# Altium PCB Beacon_V3.PcbDoc
Units mm, origin at the board's own origin, x right, y up, seen from the top; angles counter-clockwise.
Board outline 92.94 x 82.63 mm, 2 copper layers (Top Layer, Bottom Layer); 64 components, 45 nets, 274 pads, 197 vias.
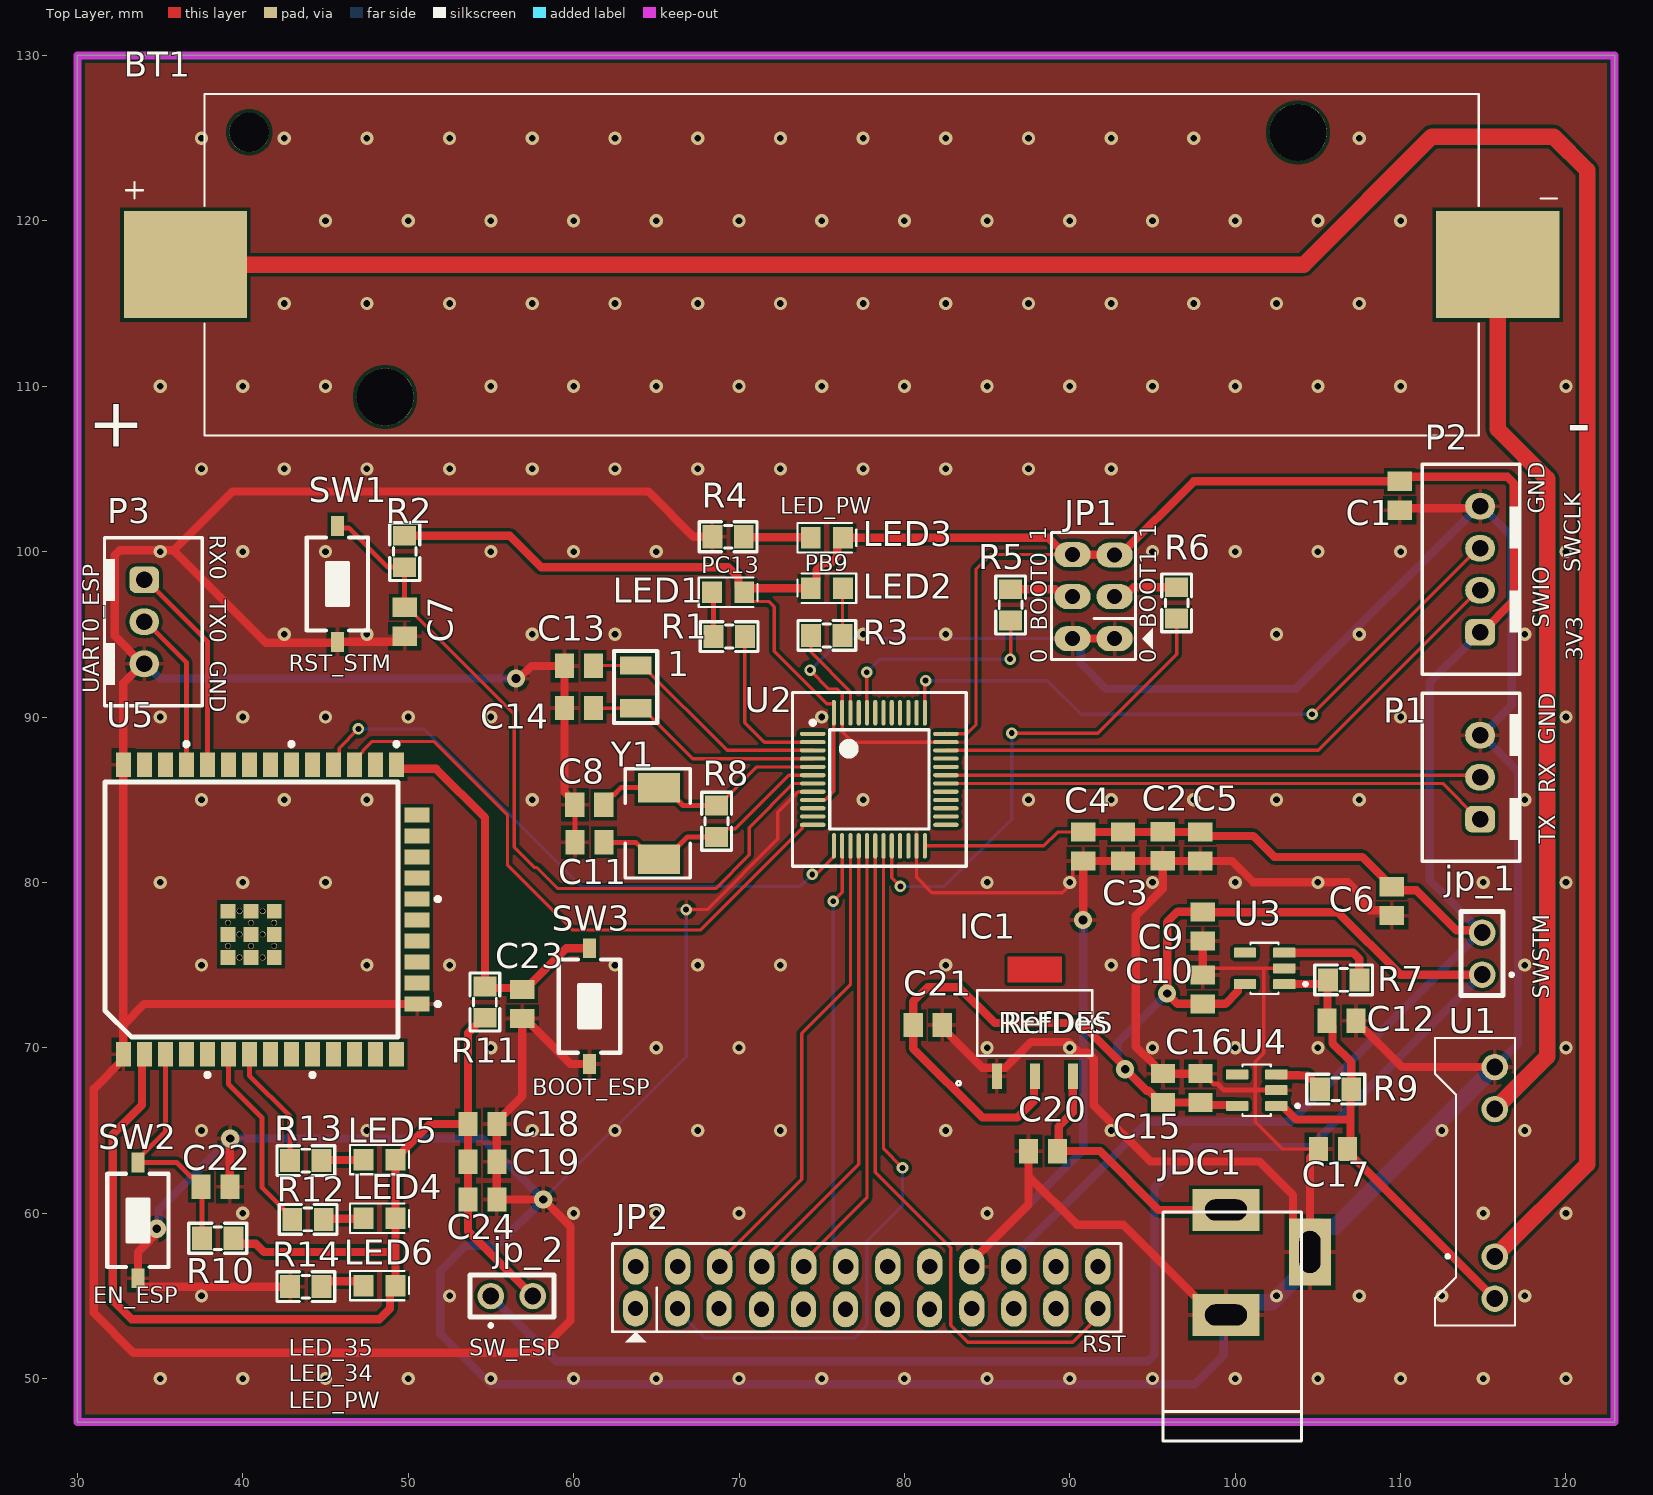
[diagram p0: Top Layer view]
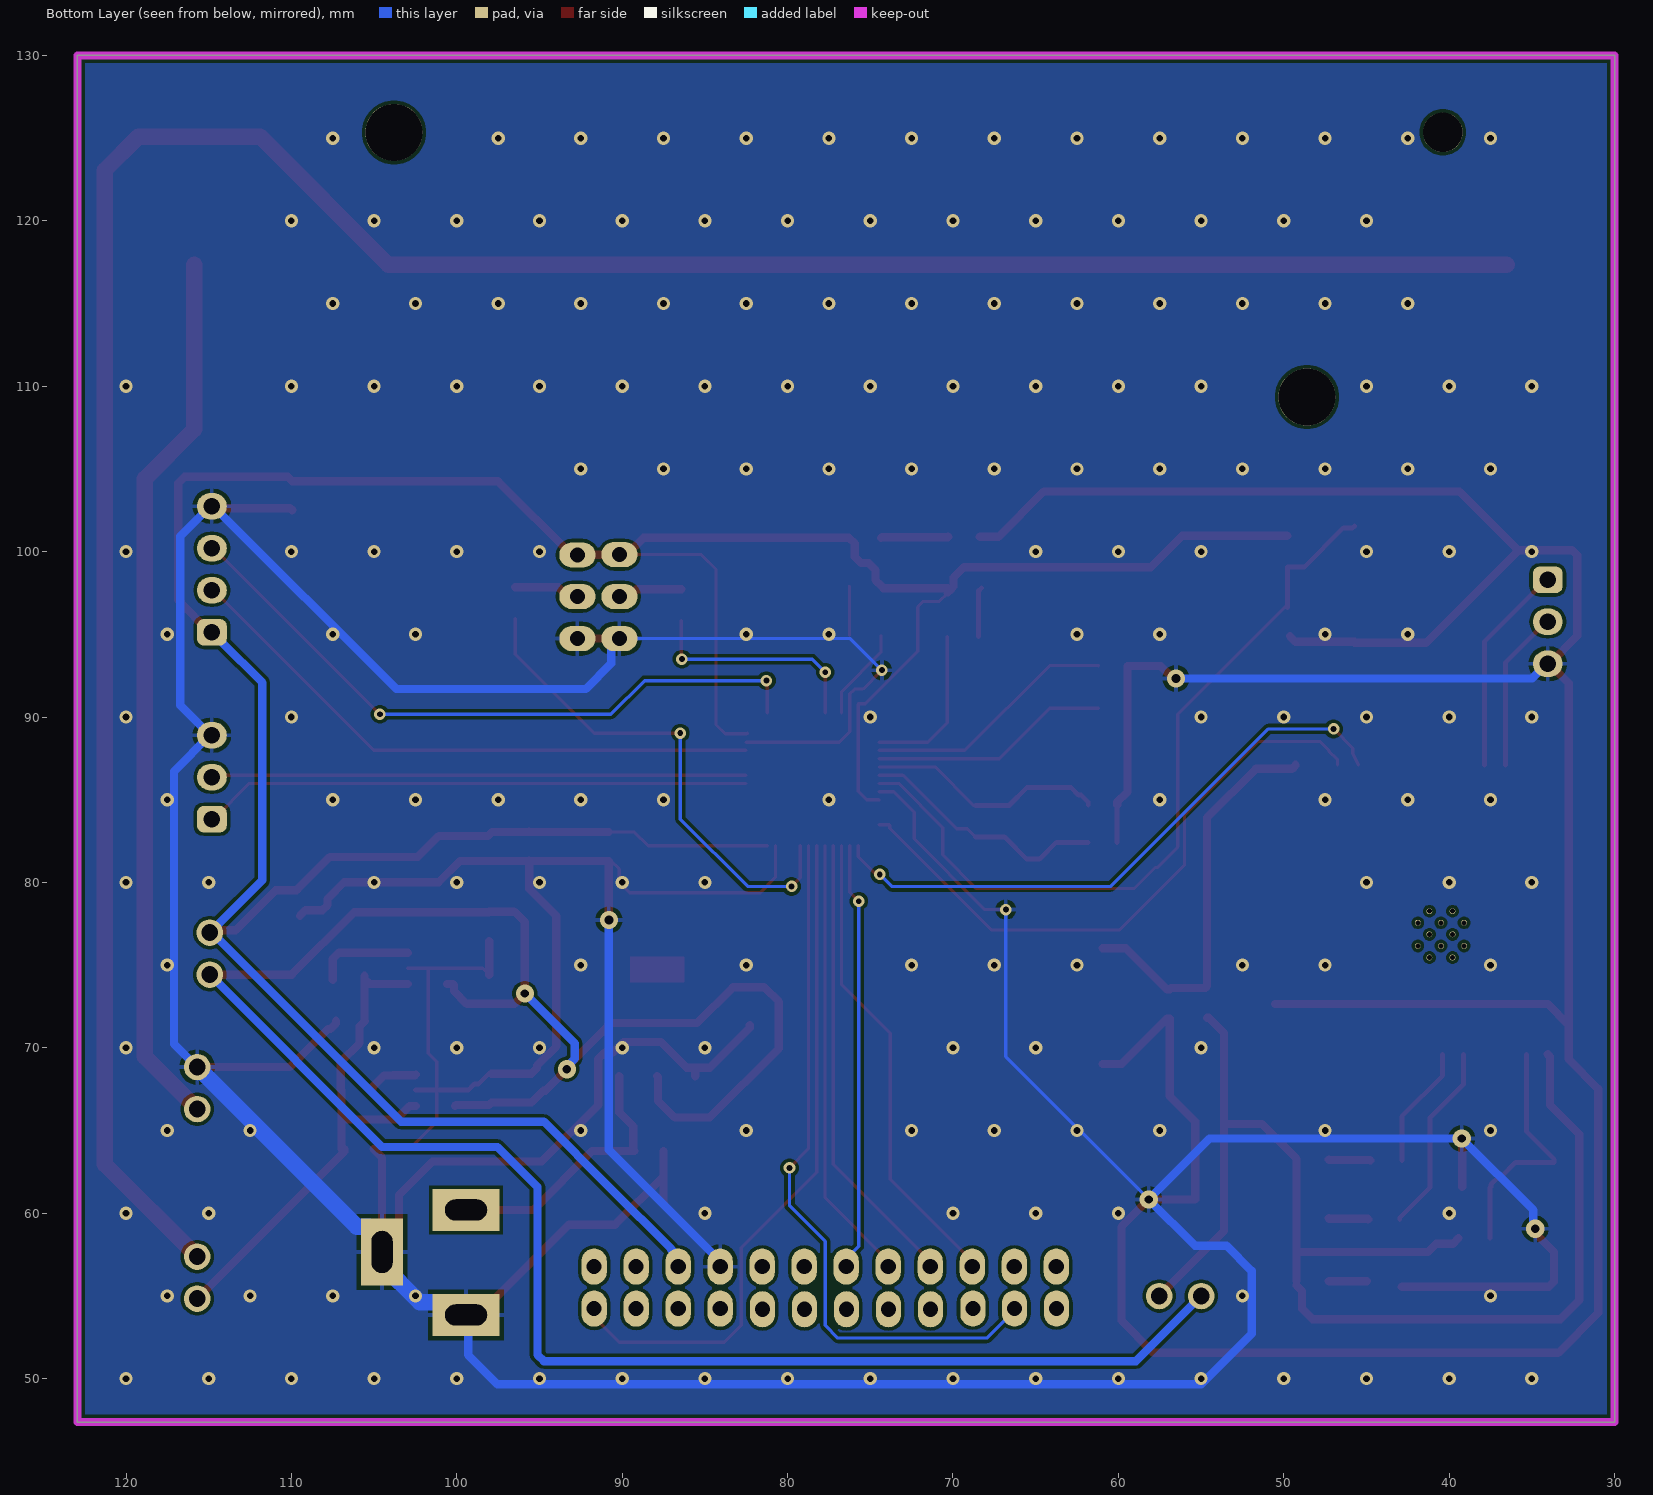
[diagram p1: Bottom Layer view, seen from below]

## Layer stack, top to bottom
Top Solder: solder mask 0.0102, Solder Resist, Dk 3.5
Top Layer: signal copper 0.0356
Dielectric 1: dielectric 0.32, FR-4, Dk 4.8
Bottom Layer: signal copper 0.0356
Bottom Solder: solder mask 0.0102, Solder Resist, Dk 3.5

## Board outline
30,47.371 30,130 122.936,130 122.936,47.371

## Design rules (kind name [scope] priority, off if disabled: settings)
Clearance [All] p1: gap=0.2 ignorepadtopadclearanceinfootprint=FALSE
PolygonConnect [All] p1: connectstyle=Relief reliefconductorwidth=0.254 reliefentries=4 polygonreliefangle="90 Angle" airgapwidth=0.254
RoutingVias [All] p1: holewidth=0.711 width=1.27 viastyle="Through Hole" minholewidth=0.711 minwidth=1.27 maxholewidth=0.711 maxwidth=1.27
SolderMaskExpansion [All] p1: expansion=0.102 istentingtop=FALSE
Width POW [InNetClass('POW')] p1: maxlimit=1 minlimit=0.2 preferedwidth=0.5
Width RON [InNetClass('RON')] p2: maxlimit=0.5 minlimit=0.2 preferedwidth=0.3
30 further rules are at their usual default settings.

## Classes and differential pairs
net class RON: BOOT0 BOOT1 BOOT_ESP DB_RX DB_TX DC_IN DW_IRQ DW_NSS DW_RESET EN_ESP LED_ESP_34 LED_ESP_35 MISO MOSI NetJP1_2 NetJP1_5 NetLED1_2 NetLED2_2 NetLED3_2 NetLED4_2 NetLED5_2 NetLED6_2 NetR7_2 NetR9_2 OSCIN OSCOUT PB9 PC13 PC14 PC15 RESET RX0_ESP SCK STMRX_ESPTX STMTX-ESPRX SWCLK SWIO TX0_ESP
net class POW: 3V3 3V3_ESP GND O_3V3 VBAT+ VBAT- VOUT

## Components (designator, comment, footprint, x,y, rotation, side; value= is the part's Value field where it differs from the comment)
1 "ABS07" ABS07 63.754,91.821 r90 top
BT1 "1042P" BAT_1042P 76.2,117.348 r180 top
C1 "10uF" Capacitor_0805 109.944,103.378 r90 top
C2 "0.1uF" Capacitor_0805 95.615,82.183 r270 top
C3 "0.1uF" Capacitor_0805 93.218,82.169 r270 top
C4 "0.1uF" Capacitor_0805 90.805,82.169 r270 top
C5 "0.1uF" Capacitor_0805 97.886,82.169 r270 top
C6 "0.1uF" Capacitor_0805 109.474,78.867 r270 top
C7 "0.1uF" Capacitor_0805 49.784,95.758 r270 top
C8 "20pF" Capacitor_0805 60.946,84.693 r0 top
C9 "47uF" Capacitor_0805 98.044,77.329 r270 top
C10 "0.1uF" Capacitor_0805 98.044,73.533 r90 top
C11 "20pF" Capacitor_0805 60.96,82.423 r0 top
C12 "0.1uF" Capacitor_0805 106.426,71.628 r0 top
C13 "20pF" Capacitor_0805 60.325,93.091 r0 top
C14 "20pF" Capacitor_0805 60.325,90.551 r0 top
C15 "47uF" Capacitor_0805 95.633,67.564 r90 top
C16 "0.1uF" Capacitor_0805 97.904,67.564 r90 top
C17 "0.1uF" Capacitor_0805 105.918,63.881 r180 top
C18 "0.1uF" Capacitor_0805 54.483,65.389 r0 top
C19 "10uF" Capacitor_0805 54.483,63.119 r0 top
C20 "10uF" Capacitor_0805 88.378,63.754 r180 top
C21 "10uF" Capacitor_0805 81.407,71.374 r0 top
C22 "10uF" Capacitor_0805 38.34,61.595 r0 top
C23 "10uF" Capacitor_0805 56.896,72.644 r270 top
C24 "0.1uF" Capacitor_0805 54.483,60.833 r0 top
IC1 "NCP1117ST33T3G" SOT223-3_ONS 87.884,71.501 r0 top
JDC1 "Jac DC" DC-IN 101.981,57.023 r90 top
JP1 "Connector 3x2" JP3x2 91.44,97.282 r90 top
JP2 "Connector 12x2" JP12X2_1 63.754,54.229 r0 top
jp_1 "SW_POWER" JP_1x2 114.935,75.692 r90 top
jp_2 "SW_ESP" JP_1x2 56.261,54.991 r0 top
LED1 "Led" "Led 0805 Blue" 69.342,97.536 r180 top
LED2 "Led" "Led 0805 Blue" 75.311,97.79 r0 top
LED3 "Led" "Led 0805 Blue" 75.311,100.838 r180 top
LED4 "Led" "Led 0805 Blue" 48.26,59.69 r180 top
LED5 "Led" "Led 0805 Blue" 48.26,63.246 r180 top
LED6 "Led" "Led 0805 Blue" 48.26,55.626 r180 top
P1 "UART" HDR/Header/3/BOX 114.808,86.36 r180 top
P2 "SWD" HDR/Header/4/BOX 114.808,98.933 r90 top
P3 "UART" HDR/Header/3/BOX 34.036,95.758 r0 top
R1 "1k" "tro smd 0805" 69.399,94.93 r0 top
R2 "10k" "tro smd 0805" 49.723,100.006 r90 top
R3 "1k" "tro smd 0805" 75.311,94.869 r180 top
R4 "1k" "tro smd 0805" 69.342,100.838 r180 top
R5 "10k" "tro smd 0805" 86.36,96.774 r90 top
R6 "10k" "tro smd 0805" 96.52,96.901 r270 top
R7 "1k" "tro smd 0805" 106.553,74.168 r0 top
R8 "1M" "tro smd 0805" 68.58,83.693 r90 top
R9 "1k" "tro smd 0805" 106.074,67.437 r180 top
R10 "10k" "tro smd 0805" 38.481,58.547 r0 top
R11 "10k" "tro smd 0805" 54.696,72.771 r270 top
R12 "1k" "tro smd 0805" 43.942,59.563 r180 top
R13 "1k" "tro smd 0805" 43.815,63.119 r180 top
R14 "1k" "tro smd 0805" 43.815,55.499 r180 top
SW1 "SW" SW1-SMD 45.72,98.044 r90 top value="SW chip 2 pin"
SW2 "SW" SW1-SMD 33.655,59.563 r90 top value="SW chip 2 pin"
SW3 "SW" SW1-SMD 60.96,72.517 r90 top value="SW chip 2 pin"
U1 "TP4056_charger" TP4056_charger 127.197,61.834 r180 top
U2 "STM32F103C8T6" LQFP48 78.486,86.233 r270 top
U3 "AP2112K-3.3TRG1" SOT95P285X140-5N 101.78,74.803 r180 top
U4 "AP2112K-3.3TRG1" SOT95P285X140-5N 101.301,67.437 r180 top
U5 "ESP32_WROOM_32U" ESP32_WROOM_32U 41.656,78.359 r90 top
Y1 "8Mhz" "Thach Anh 2 chan SMD5032" 65.151,83.566 r90 top value=4Mhz

## Footprints (in the part's own frame and the unit in brackets; to place one, negate y for a bottom-side part, rotate by r counter-clockwise, add the part's x,y. Pads: shape width x height; smd on the part's side, far side on the other; paste and mask are expansions set on the pad)
ABS07 [mm] "HC-49US XTAL"
  rect 1.1x1.9 smd: 1(-1.29,0) 2(1.29,0)
  silkscreen extent -2.19,-1.3 2.18,1.31, body extent -1.6,-0.75 1.6,0.75, height 0.9
BAT_1042P [mm]
  rect 7.46x6.47 smd: N(-39.67,0) P(39.67,0)
  round 3.45 hole 3.45 unplated: ""(-27.6,-8) ""(27.6,8)
  round 2.39 hole 2.39 unplated: ""(35.82,-8)
  silkscreen extent -43.25,-10.32 43.25,10.32, body extent -43,-9.94 43,10.71, height 14.86
Capacitor_0805 [mm]
  rect 1.16x1.47 smd: 1(-0.875,0) 2(0.875,0)
  body extent -1,-0.6 1,0.6, height 1.2
DC-IN [mil] "Jac DC input"
  rect 100x160 hole 50 slot 100 at 90 deg: 1(125,100) 2(-125,100)
  rect 160x100 hole 50 slot 100 at 0 deg: 3(25,-100)
  silkscreen extent -425,-80 120,250, body extent -410,-105 134,269, height 434
ESP32_WROOM_32U [mm]
  rect 1.5x0.9 smd: 1(-8.75,8.88) 2(-8.75,7.61) 3(-8.75,6.34) 4(-8.75,5.07) 5(-8.75,3.8) 6(-8.75,2.53) 7(-8.75,1.26) 8(-8.75,-0.01) 9(-8.75,-1.28) 10(-8.75,-2.55) 11(-8.75,-3.82) 12(-8.75,-5.09) 13(-8.75,-6.36) 14(-8.75,-7.63) 25(8.75,-7.63) 26(8.75,-6.36) 27(8.75,-5.09) 28(8.75,-3.82) 29(8.75,-2.55) 30(8.75,-1.28) 31(8.75,-0.01) 32(8.75,1.26) 33(8.75,2.53) 34(8.75,3.8) 35(8.75,5.07) 36(8.75,6.34) 37(8.75,7.61) 38(8.75,8.88)
  rect 0.9x1.5 smd: 15(-5.715,-8.88) 16(-4.445,-8.88) 17(-3.175,-8.88) 18(-1.905,-8.88) 19(-0.635,-8.88) 20(0.635,-8.88) 21(1.905,-8.88) 22(3.175,-8.88) 23(4.445,-8.88) 24(5.715,-8.88)
  rect 0.9x0.9 smd: 39_1(-2.9,2.56) 39_2(-1.5,2.56) 39_3(-0.1,2.56) 39_4(-2.9,1.16) 39_5(-1.5,1.16) 39_6(-0.1,1.16) 39_7(-2.9,-0.24) 39_8(-1.5,-0.24) 39_9(-0.1,-0.24)
  round 0.35 hole 0.3 mask+0: 40_1(-2.2,2.56) 40_2(-0.8,2.56) 40_3(-2.9,1.86) 40_4(-1.5,1.86) 40_5(-0.1,1.86) 40_6(-2.2,1.16) 40_7(-0.8,1.16) 40_8(-2.9,0.46) 40_9(-1.5,0.46) 40_10(-0.1,0.46) 40_11(-2.2,-0.24) 40_12(-0.8,-0.24)
  silkscreen extent -10.1,-10.23 10.1,10, body extent -9,-9.13 9,10.07, height 3.35
HDR/Header/3/BOX [mm]
  rrect50% 1.8x1.6 hole 1: 1(0,2.54)
  oval 1.8x1.6 hole 1: 2(0,0) 3(0,-2.54)
  silkscreen extent -2.41,-5.08 3.5,5.08, body extent -2.29,-5 3.41,5, height 7
HDR/Header/4/BOX [mm]
  rrect50% 1.6x1.8 hole 1: 1(-3.81,0)
  oval 1.6x1.8 hole 1: 2(-1.27,0) 3(1.27,0) 4(3.81,0)
  silkscreen extent -6.35,-2.41 6.35,3.5, body extent -6.25,-2.3 6.25,3.4, height 7
JP3x2 [mil] "Connector 3x2"
  oval 60x86 hole 36: 1(-100,-50) 2(0,-50) 3(99,-50) 4(-100,50) 5(0,50) 6(100,50)
  silkscreen extent -150,-141 153,100, body extent -150,-100 150,100, height 335
JP12X2_1 [mil]
  oval 60x86 hole 36: 1(-0.5,0.5) 2(99.5,0.5) 3(198.5,0.5) 4(299.5,-1.5) 5(399.5,-1.5) 6(499.5,-1.5) 7(599.5,-1.5) 8(699.5,-1.5) 9(800,0) 10(900,0) 11(1000,0) 12(1100,0) 13(0,100) 14(100,100) 15(200,100) 16(300,100) 17(400,100) 18(500,100) 19(600,100) 20(700,100) 21(800,100) 22(900,100) 23(1000,100) 24(1100,100)
  silkscreen extent -55,-80 1155,155, body extent -55,-47 1155,150, height 366
JP_1x2 [mm] "CWF2 (DS1069-1x2)"
  round 1.6 hole 1.02 mask+0.1: 1(-1.27,0) 2(1.27,0)
  silkscreen extent -2.54,-1.88 2.54,1.27, body extent -3.77,-2.2 3.73,3.55, height 7
"Led 0805 Blue" [mm]
  rect 1.2x1.3 smd: 1(-0.975,0) 2(0.975,0)
  silkscreen extent -1.78,-0.89 1.78,0.89, body extent -1.01,-0.62 1.01,0.63, height 1.1
LQFP48 [mm]
  oval 0.25x1.55 smd: 1(-2.75,-4.025) 2(-2.25,-4.025) 3(-1.75,-4.025) 4(-1.25,-4.025) 5(-0.75,-4.025) 6(-0.25,-4.025) 7(0.25,-4.025) 8(0.75,-4.025) 9(1.25,-4.025) 10(1.75,-4.025) 11(2.25,-4.025) 12(2.75,-4.025) 25(2.75,4.025) 26(2.25,4.025) 27(1.75,4.025) 28(1.25,4.025) 29(0.75,4.025) 30(0.25,4.025) 31(-0.25,4.025) 32(-0.75,4.025) 33(-1.25,4.025) 34(-1.75,4.025) 35(-2.25,4.025) 36(-2.75,4.025)
  oval 1.55x0.25 smd: 13(4.025,-2.75) 14(4.025,-2.25) 15(4.025,-1.75) 16(4.025,-1.25) 17(4.025,-0.75) 18(4.025,-0.25) 19(4.025,0.25) 20(4.025,0.75) 21(4.025,1.25) 22(4.025,1.75) 23(4.025,2.25) 24(4.025,2.75) 37(-4.025,2.75) 38(-4.025,2.25) 39(-4.025,1.75) 40(-4.025,1.25) 41(-4.025,0.75) 42(-4.025,0.25) 43(-4.025,-0.25) 44(-4.025,-0.75) 45(-4.025,-1.25) 46(-4.025,-1.75) 47(-4.025,-2.25) 48(-4.025,-2.75)
  silkscreen extent -5.25,-5.25 5.25,5.25, body extent -4.5,-4.5 4.5,4.5, height 1.5
SOT95P285X140-5N [mm]
  rrect15% 1.35x0.6 smd: 1(-1.185,0.95) 2(-1.185,0) 3(-1.185,-0.95) 4(1.185,-0.95) 5(1.185,0.95)
  silkscreen extent -2.57,-1.55 0.85,1.55, body extent -1.5,-1.4 1.5,1.4, height 1.4
SOT223-3_ONS [mil]
  rect 24x61 smd paste+0 mask+0: 1(-90.5,-127) 2(0,-127) 3(90.5,-127)
  Top Layer region: 64,96.5 64,157.5 -64,157.5 -64,96.5
  silkscreen extent -186,-148 136,78, body extent -131,-144 131,144, height 68
SW1-SMD [mm]
  rect 1.2x0.8 smd: 1(-3.5,0) 2(3.5,0)
  silkscreen extent -2.82,-1.85 2.82,1.85, body extent -3.05,-1.85 3.05,1.85, height 2.5
"Thach Anh 2 chan SMD5032" [mil]
  rect 70x100 smd: 1(-85,0) 2(85,0)
  silkscreen extent -130,-75 130,80, body extent -98,-63 98,63, height 51
TP4056_charger [mm]
  round 1.6 hole 1.02 mask+0.1: 1(11.5,4.46) 2(11.5,-4.46) 3(11.5,7) 4(11.5,-7)
  silkscreen extent 10.29,-8.76 15.11,8.64, body extent -14.19,-8.76 15.11,8.64, height 9.34
"tro smd 0805" [mm]
  rect 1.2x1.4 smd: 1(-0.946,-0.061) 2(0.954,-0.061)
  silkscreen extent -1.75,-0.97 1.75,0.84, body extent -1.56,-0.76 1.44,0.64, height 0.53

## Part data
1: "SMD Quartz Crystal", Created by="Zion Blue", Published="28 April 2014", Publisher="Cynetik Group"
BT1: "SMT Polarized Battery Holder for 18650 Battery", Package=None, Check_prices=https://www.snapeda.com/parts/1042P/Keystone/view-part/?ref=eda, MF="Keystone Electronics", MP=1042P, SnapEDA_Link=https://www.snapeda.com/parts/1042P/Keystone/view-part/?ref=snap
C1 C2 C3 C4 C5 C6 C7 C8 C9 C10 C11 C12 C13 C14 C15 C16 C17 C18 C19 C20 C21 C22 C23 C24: library part Capacitor_0805, "Capacitor; Ceramic; Cap; .220uF; Tol 10%; SMT; Vol-Rtg 50V; X7R; Tape And Reel"
IC1: "SOT223"
JDC1: library part DCIN, "Jac DC input"
JP1: library part JP3x2
JP2: library part JP12x2
jp_1 jp_2: library part JP_1x2
LED1 LED2 LED3 LED4 LED5 LED6: "Typical LED"
P1 P3: library part "Header 3", "Header, 3-Pin"
P2: library part "Header 4_1", "Header, 4-Pin"
R1 R3 R4 R7 R9 R12 R13 R14: library part "Tro 0805 1% 1k", "Dán", Chung_Loai=Dán, Don_Vi=Con, Ma_Hang=MH005468, So_Chan=2, Ten_Linh_Kien="Trở 0805 1% 1k"
R2 R5 R6 R10 R11: library part "Tro 0805 1% 10k", "Dán", Chung_Loai=Dán, Don_Vi=Con, Ma_Hang=MH005473, So_Chan=2, Ten_Linh_Kien="Trở 0805 1% 10k"
R8: library part "Tro 0805 1% 1M", "Dán", Chung_Loai=Dán, Don_Vi=Con, Ma_Hang=MH005469, So_Chan=2, Ten_Linh_Kien="Trở 0805 1% 1M"
SW1 SW2 SW3: library part SW2, "Switch button 2 pin"
U2: "STM32 ARM-based 32-bit MCU with ARM 32-bit Cortex-M3 Microcontroller, 128 Kbytes Flash, 48-pin LQFP, Industrial Temperature", ComponentLink1Description="Manufacturer Link", ComponentLink1URL=www.st.com/stm32, ComponentLink2Description=Datasheet, ComponentLink2URL=http://www.st.com/stonline/products/literature/ds/13586.pdf, DatasheetVersion="rev6, Mar-2008", PackageDescription="48-Pin Low-Profile Quad Flat Pack, 7 x 7 mm Body, 0.5 mm Pitch (LQFP48)", PackageReference=LQFP48, PackageVersion=Mar-2008, Published=30-May-2008, Publisher="Altium Limited"
U3 U4: "Linear Voltage Regulator IC Positive Fixed 1 Output 600mA SOT-25", Package="SOT-753 Diodes Inc.", Availability="In Stock", Check_prices=https://www.snapeda.com/parts/AP2112K-3.3TRG1/Diodes+Inc./view-part/?ref=eda, MF="Diodes Inc.", MP=AP2112K-3.3TRG1, Price=None, Purchase-URL=https://pricing.snapeda.com/search/part/AP2112K-3.3TRG1/?ref=eda, SnapEDA_Link=https://www.snapeda.com/parts/AP2112K-3.3TRG1/Diodes+Inc./view-part/?ref=snap
U5: "Bluetooth, WiFi 802.11b/g/n, Bluetooth v4.2 +EDR, Class 1, 2 and 3 Transceiver Module 2.4GHz ~ 2.5GHz Antenna Not Included, U.FL Surface Mount"
Y1: library part "Thach Anh 2 chan SMD 5032", "Crystal For all Crystal 2pin."

## Via types
v1: diameter 0.8, hole 0.4, Top Layer to Bottom Layer, 178 vias
v2: diameter 0.7, hole 0.35, Top Layer to Bottom Layer, 12 vias
v3: diameter 1.1, hole 0.5, Top Layer to Bottom Layer, 5 vias
v4: diameter 1.1, hole 0.55, Top Layer to Bottom Layer, 2 vias

## Nets (pads, with @x,y where several pads share a name; then routed paths per layer and width w, separated by ;. In a path a pad name is that pad's centre, name@x,y a point inside that pad or via, vN(x,y) a via of type N, cw(c..) or ccw(c..) an arc to the next point about the centre after c; other vN are vias at no path point)
3V3: C1.2 C2.1 C3.1 C4.1 C5.1 C6.1 JP1.3 JP1.6 JP2.22 jp_1.2 LED1.1 LED2.1 LED3.1 P2.1 R2.2 U2.9 U2.24 U2.36 U2.48 | length 211.7
  Top Layer w0.2: LED1.1 70.317,97.486 70.817,96.986 71.807,96.986 72.136,96.657 72.136,93.98 75.308,90.808 75.713,90.808 75.736,90.785 U2.48 75.736,85.507 75.222,84.993 74.471,84.993 U2.9 ; U2.24 88.431,82.208 89.267,83.044 C4.1 ; U2.36@82.423,89.027 82.467,88.983 U2.36 83.776,88.983 84.328,89.535 84.328,98.933 85.217,99.822 89.734,99.822 JP1.6
  Top Layer w0.5: R2.2 56.139,100.96 58.039,99.06 69.342,99.06 69.967,98.435 69.967,97.886 70.19,97.663 LED1.1 ; LED1.1@70.317,97.79 74.209,97.79 74.336,97.917 74.686,98.267 74.686,98.904 75.096,99.314 75.565,99.314 75.936,99.685 75.936,100.488 LED3.1 88.718,100.838 JP1.6@89.734,99.822 ; JP1.6 90.183,99.809 92.697,99.809 JP1.3 93.04,99.797 97.497,104.253 C1.2 110.212,104.521 116.459,104.521 116.84,104.14 116.84,97.055 114.908,95.123 P2.1 ; C4.1 C3.1 93.225,83.051 95.608,83.051 C2.1 95.622,83.051 97.879,83.051 C5.1 98.126,82.804 101.092,82.804 102.362,81.534 107.682,81.534 C6.1 109.69,79.526 110.959,79.526 113.385,77.1 114.797,77.1 jp_1.2
  Bottom Layer w0.5: JP2.22 86.614,57.376 87.031,57.793 87.031,57.821 90.776,61.566 94.742,65.532 103.378,65.532 114.808,76.962 jp_1.2 111.76,80.137 111.76,92.075 114.251,94.566 114.251,94.584 114.789,95.123 P2.1
3V3_ESP: C18.1 C19.1 C24.1 jp_2.2 LED4.1 LED5.1 LED6.1 R10.2 R11.2 U5.2 | length 76.5
  Top Layer w0.5: U5.2 33.909,69.472 33.909,66.548 32.131,64.77 32.131,54.737 33.274,53.594 48.26,53.594 48.892,54.226 48.892,55.283 LED6.1 ; R10.2 39.774,58.148 40.785,58.148 41.275,57.658 49.108,57.658 49.235,57.785 ; LED6.1@49.235,55.88 49.235,57.785 ; R11.2 54.535,71.817 53.608,70.89 C18.1 ; jp_2.2 53.608,58.914 C24.1 C19.1 C18.1 ; 49.235,57.785 LED4.1 LED5.1 49.235,63.296 51.328,65.389 C18.1
BOOT0: R5.1 U2.44 | length 13.8
  Top Layer w0.2: v2(77.724,92.71) 77.73,92.704 77.73,90.264 U2.44 ; v2@86.36,93.472 v2(86.39,93.502) 86.421,93.533 R5.1
  Bottom Layer w0.2: v2(77.724,92.71) 78.516,93.502 v2(86.39,93.502)
BOOT1: R6.2 U2.20 | length 30.4
  Top Layer w0.2: U2.20 79.236,80.276 v2(79.756,79.756) ; v2(86.487,89.027) 91.694,89.027 96.459,93.792 R6.2
  Bottom Layer w0.2: v2(79.756,79.756) 82.423,79.756 86.487,83.82 v2(86.487,89.027)
BOOT_ESP: C23.1 R11.1 SW3.2 U5.25 | length 24.3
  Top Layer w0.5: U5.25 49.286,87.068 49.486,86.868 51.689,86.868 54.635,83.922 R11.1 54.734,73.618 56.797,73.618 C23.1 57.051,73.519 59.549,76.017 SW3.2
DB_RX: P1.2 U2.31 | length 32.3
  Top Layer w0.2: U2.31 82.521,86.473 114.695,86.473 P1.2
DB_TX: P1.1 U2.30 | length 33.2
  Top Layer w0.2: U2.30 112.545,85.983 114.708,83.82 P1.1
DC_IN: C20.1 IC1.3 JDC1.1 | length 16.6
  Top Layer w0.5: IC1.3 90.17,68.263 90.17,66.082 89.327,65.239 89.327,63.828 C20.1 91.821,63.754 95.377,60.198 JDC1.1
DW_IRQ: JP2.2 U2.19 | length 43.3
  Top Layer w0.2: JP2.2@66.281,53.911 JP2.2 ; U2.19 78.736,63.885 v2(79.883,62.738)
  Bottom Layer w0.2: JP2.2 66.281,54.115 67.945,52.451 76.962,52.451 77.724,53.213 77.724,58.293 79.883,60.452 v2(79.883,62.738)
DW_NSS: JP2.18 U2.14 | length 26
  Top Layer w0.2: v2(75.692,78.867) 76.236,79.411 U2.14
  Bottom Layer w0.2: v2(75.692,78.867) 75.692,57.992 76.454,57.23 JP2.18
DW_RESET: JP2.12 U2.18 | length 41.3
  Top Layer w0.2: U2.18 78.236,62.48 82.804,57.912 82.804,53.213 83.82,52.197 90.18,52.197 91.694,53.711 JP2.12
EN_ESP: C22.1 R10.1 SW2.2 U5.3 | length 14.9
  Top Layer w0.3: U5.3 35.316,64.924 33.655,63.263 SW2.2 35.997,63.063 36.88,62.18 37.035,62.18 37.465,61.75 C22.1 37.535,61.525 R10.1
GND: C1.1 C2.2 C3.2 C4.2 C5.2 C6.2 C7.2 C8.1 C9.2 C10.2 C11.1 C12.2 C13.1 C14.1 C15.2 C16.2 C17.2 C18.2 C19.2 C20.2 C21.2 C22.2 C23.2 C24.2 IC1.1 JDC1.2 JDC1.3 JP1.1 JP1.4 JP2.21 P1.3 P2.4 P3.3 R4.2 R14.2 SW1.1 SW2.1 SW3.1 U1.4 U2.8 U2.23 U2.35 U2.47 U3.2 U4.2 U5.1 U5.15 U5.38 | length 660.2
  Top Layer w0.2: v2(66.802,78.359) 68.072,78.359 72.34,82.627 72.34,84.239 73.574,85.473 74.451,85.473 U2.8 ; v2(74.295,92.837) 75.438,91.694 75.946,91.694 76.236,91.404 U2.47 76.236,89.118 76.879,88.475 79.354,88.475 79.363,88.483 U2.35 ; U2.23 80.736,80.3 81.661,79.375 89.545,79.375 90.17,80 90.17,80.814 90.65,81.294 C4.2 ; JP2.21@84.074,56.439 JP2.21 ; C10.2 98.439,74.803 101.854,74.803 ; U3.2 101.854,74.803 ; C17.2 102.87,63.881 101.219,65.532 101.219,67.437 101.219,69.151 101.727,69.659 101.727,74.676 101.854,74.803
  Top Layer w0.3: C8.1 60.071,82.437 C11.1 ; C16.2 98.059,68.439 98.68,67.818 98.933,67.818 99.314,67.437 101.219,67.437 U4.2 ; P1.3 P1.3@114.908,88.9
  Top Layer w0.5: P3.3 P3.3@33.936,93.218 ; v3@34.807,58.792 33.655,57.641 SW2.1 33.655,55.863 33.958,55.56 R14.2 ; C22.2 v3@39.215,64.234 ; SW1.1@45.72,94.488 41.402,94.488 35.814,100.076 ; SW1.1 49.29,94.544 C7.2@49.629,94.883 ; U5.15 34.036,72.644 32.776,71.384 ; v4(56.515,92.329) 56.677,92.329 57.439,93.091 C13.1 C14.1 59.45,85.469 60.071,84.848 C8.1 ; SW3.1 59.803,69.017 57.051,71.769 C23.2 56.896,67.082 55.358,65.544 C18.2 C19.2 C24.2 v3(58.166,60.833) 59.817,59.182 59.817,53.514 57.865,51.562 33.401,51.562 30.988,53.975 30.988,67.521 32.776,69.309 U5.1 32.776,71.384 ; R4.2 67.249,100.899 64.516,103.632 39.37,103.632 35.814,100.076 ; C21.2 82.282,71.219 84.701,68.8 85.53,68.8 IC1.1@85.585,68.745 ; JP2.21 84.074,57.099 87.503,60.528 87.503,62.23 ; IC1.1 IC1.1@85.585,68.745 ; C20.2 87.503,62.23 ; JP1.4 JP1.1 ; v4@90.805,77.978 C4.2 C3.2 93.225,81.301 95.608,81.301 C2.2 ; C16.2 C15.2 95.478,68.439 95.148,68.769 95.148,68.924 93.98,70.092 93.98,77.978 95.615,79.613 C2.2 ; C10.2 C9.2 ; JDC1.2 98.679,53.848 93.218,59.309 90.424,59.309 87.503,62.23 ; C17.2 104.521,63.359 JDC1.3 103.501,58.678 103.501,61.091 101.473,63.119 94.869,63.119 91.44,66.548 91.44,69.342 91.059,69.723 90.551,69.723 89.916,70.358 87.668,70.358 86.11,68.8 85.64,68.8 IC1.1@85.585,68.745 ; C12.2 107.301,71.473 107.631,71.143 107.786,71.143 110.095,68.834 U1.4 ; C6.2 109.144,78.322 108.114,78.322 107.823,78.613 107.823,78.994 106.807,80.01 101.092,80.01 99.808,81.294 C5.2 97.879,81.301 95.622,81.301 C2.2 ; C1.1 110.064,102.623 114.688,102.623 P2.4 ; 32.776,71.384 U5.38 32.776,92.058 P3.3@33.936,93.218 ; P3.3@33.936,93.218 32.258,94.896 32.258,99.783 32.551,100.076 35.814,100.076
  Bottom Layer w0.2: v3(58.166,60.833) 66.802,69.469 v2(66.802,78.359) ; v2(74.295,92.837) 76.2,94.742 JP1.4 ; JP2.21@84.074,56.439 JP2.21
  Bottom Layer w0.5: P3.3 34.09,93.218 34.979,92.329 v4(56.515,92.329) ; v3(34.798,59.055) 34.913,59.17 34.913,60.186 v3(39.243,64.516) 54.483,64.516 v3(58.166,60.833) 55.372,58.039 53.467,58.039 51.943,56.515 51.943,52.705 54.991,49.657 97.536,49.657 99.314,51.435 99.314,53.721 JDC1.2 ; JP2.21 84.074,57.099 90.805,63.83 v4(90.805,77.724) ; JP1.4 90.193,94.742 90.666,94.269 90.666,93.23 92.202,91.694 103.659,91.694 114.708,102.743 P2.4 114.908,102.743 116.713,100.938 116.713,90.705 P1.3@114.908,88.9 ; P1.3 P1.3@114.908,88.9 ; U1.4 117.094,70.231 117.094,86.714 P1.3@114.908,88.9
  Bottom Layer w1: JDC1.2 100.211,54.618 102.243,54.618 104.521,56.896 JDC1.3 104.521,58.42 105.291,59.19 106.053,59.19 U1.4
  other v1: 35,50 40,50 45,50 50,50 55,50 60,50 65,50 70,50 75,50 80,50 85,50 90,50 95,50 100,50 105,50 110,50 115,50 120,50 37.5,55 52.5,55 102.5,55 107.5,55 112.5,55 117.5,55 40,60 60,60 65,60 70,60 85,60 115,60 120,60 37.5,65 47.5,65 57.5,65 62.5,65 67.5,65 72.5,65 82.5,65 92.5,65 112.5,65 117.5,65 55,70 65,70 70,70 85,70 90,70 95,70 100,70 105,70 120,70 37.5,75 47.5,75 52.5,75 62.5,75 67.5,75 72.5,75 82.5,75 92.5,75 117.5,75 35,80 40,80 45,80 85,80 90,80 95,80 100,80 105,80 115,80 120,80 37.5,85 42.5,85 47.5,85 57.5,85 77.5,85 87.5,85 92.5,85 97.5,85 102.5,85 107.5,85 117.5,85 35,90 40,90 45,90 50,90 55,90 75,90 110,90 120,90 42.5,95 47.5,95 57.5,95 62.5,95 77.5,95 82.5,95 102.5,95 107.5,95 117.5,95 35,100 40,100 45,100 55,100 60,100 65,100 95,100 100,100 105,100 110,100 120,100 37.5,105 42.5,105 47.5,105 52.5,105 57.5,105 62.5,105 67.5,105 72.5,105 77.5,105 82.5,105 87.5,105 92.5,105 35,110 40,110 45,110 55,110 60,110 65,110 70,110 75,110 80,110 85,110 90,110 95,110 100,110 105,110 110,110 120,110 42.5,115 47.5,115 52.5,115 57.5,115 62.5,115 67.5,115 72.5,115 77.5,115 82.5,115 87.5,115 92.5,115 97.5,115 102.5,115 107.5,115 45,120 50,120 55,120 60,120 65,120 70,120 75,120 80,120 85,120 90,120 95,120 100,120 105,120 110,120 37.5,125 42.5,125 47.5,125 52.5,125 57.5,125 62.5,125 67.5,125 72.5,125 77.5,125 82.5,125 87.5,125 92.5,125 97.5,125 107.5,125
LED_ESP_34: R12.2 U5.6 | length 11.6
  Top Layer w0.3: U5.6 39.126,67.808 41.148,65.786 41.148,61.563 42.988,59.724 R12.2
LED_ESP_35: R13.2 U5.7 | length 7.5
  Top Layer w0.3: U5.7 40.396,68.316 42.861,65.851 R13.2
MISO: JP2.16 U2.16 | length 27.9
  Top Layer w0.2: JP2.16 71.374,57.099 77.236,62.961 U2.16
MOSI: JP2.17 U2.17 | length 27
  Top Layer w0.2: JP2.17 73.914,57.099 77.736,60.921 U2.17
NetJP1_2: JP1.2 R6.1 | length 4
  Top Layer w0.5: JP1.2 93.28,97.282 93.845,97.847 R6.1
NetJP1_5: JP1.5 R5.2 | length 3.9
  Top Layer w0.5: R5.2 89.116,97.728 89.563,97.282 JP1.5
NetLED1_2: LED1.2 R1.1 | length 3
  Top Layer w0.3: LED1.2@68.281,97.79 68.453,97.618 R1.1
NetLED2_2: LED2.2 R3.1 | length 3
  Top Layer w0.2: R3.1 76.257,97.888 LED2.2@76.286,97.917
NetLED3_2: LED3.2 R4.1 | length 4.1
  Top Layer w0.5: R4.1 70.318,100.868 74.306,100.868 LED3.2
NetLED4_2: LED4.2 R12.1 | length 2.4
  Top Layer w0.5: R12.1 44.921,59.657 47.252,59.657 LED4.2
NetLED5_2: LED5.2 R13.1 | length 2.6
  Top Layer w0.5: R13.1 44.794,63.213 47.252,63.213 LED5.2
NetLED6_2: LED6.2 R14.1 | length 2.3
  Top Layer w0.5: R14.1@44.97,55.88 LED6.2@47.285,55.88
NetR7_2: R7.2 U3.3 | length 6
  Top Layer w0.5: U3.3 107.127,75.753 107.507,75.373 R7.2
NetR9_2: R9.2 U4.3 | length 3.1
  Top Layer w0.5: U4.3 102.536,68.337 103.875,68.337 103.886,68.326 104.391,68.326 105.12,67.598 R9.2
O_3V3: C9.1 C10.1 C15.1 C16.1 C21.1 IC1.2 jp_1.1 jp_2.1 U3.5 U4.5 | length 151.2
  Top Layer w0.5: jp_2.1 jp_2.1@55.201,54.781 ; IC1.2 87.829,68.22 87.829,66.786 86.829,65.786 84.709,65.786 80.532,69.963 C21.1 80.532,72.785 81.407,73.66 83.312,73.66 85.471,71.501 90.678,71.501 93.345,68.834 v3(93.345,68.707) 94.643,67.409 94.758,67.409 95.478,66.689 C16.1 98.056,66.537 100.066,66.537 U4.5 ; U3.5 100.22,73.853 100.17,73.803 100.17,73.428 99.4,72.658 C10.1 96.506,72.658 v3(95.885,73.279) 95.885,77.597 96.52,78.232 98.016,78.232 C9.1 106.2,78.204 109.982,74.422 jp_1.1
  Bottom Layer w0.5: jp_2.1 58.928,51.054 94.742,51.054 95.123,51.435 95.123,61.595 97.536,64.008 104.521,64.008 jp_1.1 ; v3(93.345,68.707) 93.345,68.869 92.863,69.351 92.863,70.257 v3(95.885,73.279)
OSCIN: C8.2 R8.2 U2.5 Y1.2 | length 14.6
  Top Layer w0.2: R8.2 68.741,84.647 71.076,86.983 U2.5
  Top Layer w0.3: C8.2 61.821,84.848 62.251,85.278 62.406,85.278 62.853,85.725 Y1.2 65.532,85.725 66.61,84.647 R8.2
OSCOUT: C11.2 R8.1 U2.6 Y1.1 | length 15.1
  Top Layer w0.2: R8.1 69.141,83.247 69.785,83.247 73.021,86.483 U2.6
  Top Layer w0.3: C11.2 63.754,82.423 64.77,81.407 Y1.1 65.532,81.407 66.872,82.747 R8.1
PB9: R3.2 U2.46 | length 5.7
  Top Layer w0.2: R3.2 74.357,93.918 76.736,91.539 U2.46
PC13: R1.2 U2.2 | length 9.8
  Top Layer w0.2: R1.2 70.353,89.667 71.537,88.483 U2.2
PC14: 1.2 C13.2 U2.3 | length 15.4
  Top Layer w0.2: C13.2 61.22,93.111 1.2 64.154,93.111 69.282,87.983 U2.3
PC15: 1.1 C14.2 U2.4 | length 14.5
  Top Layer w0.2: C14.2 61.22,90.531 1.1 64.154,90.531 67.202,87.483 U2.4
RESET: C7.1 R2.1 SW1.2 U2.7 | length 47.5
  Top Layer w0.2: C7.1 49.939,96.633 56.407,90.165 56.407,82.14 57.648,80.899 57.785,80.899 59.055,79.629 68.58,79.629 70.612,81.661 70.612,83.312 73.283,85.983 U2.7
  Top Layer w0.3: SW1.2 45.83,101.434 46.394,101.434 48.768,99.06 R2.1 C7.1
RX0_ESP: P3.1 U5.34 | length 12.8
  Top Layer w0.3: P3.1 34.136,98.298 37.856,94.578 U5.34
SCK: JP2.15 U2.15 | length 28.7
  Top Layer w0.2: JP2.15 68.834,57.099 73.787,62.052 73.787,70.866 76.736,73.815 U2.15
STMRX_ESPTX: U2.13 U5.28 | length 36.8
  Top Layer w0.2: U5.28 45.826,87.759 45.826,88.117 v2(46.99,89.281) ; v2(74.422,80.483) 74.661,80.483 75.736,81.558 U2.13
  Bottom Layer w0.2: v2(46.99,89.281) 50.927,89.281 60.452,79.756 73.695,79.756 v2(74.422,80.483)
STMTX-ESPRX: U2.12 U5.27 | length 37.8
  Top Layer w0.2: U5.27 46.746,87.409 47.266,87.929 47.266,87.983 47.802,88.519 51.562,88.519 56.007,84.074 56.007,81.026 59.909,77.124 67.686,77.124 73.827,83.266 73.827,83.46 73.85,83.483 U2.12
SWCLK: P2.3 U2.37 | length 40.1
  Top Layer w0.2: U2.37 81.236,91.939 v2@81.28,91.983 ; v2@104.763,90.258 114.708,100.203 P2.3
  Bottom Layer w0.2: v2(81.28,92.202) 88.646,92.202 90.678,90.17 v2(104.648,90.17)
SWIO: P2.2 U2.34 | length 36.3
  Top Layer w0.2: U2.34 105.028,87.983 114.708,97.663 P2.2
TX0_ESP: P3.2 U5.35 | length 9.8
  Top Layer w0.3: P3.2 34.136,95.758 36.586,93.308 U5.35
VBAT+: BT1.P U1.1 | length 156.8
  Top Layer w1: BT1.P 104.14,117.348 111.887,125.095 119.253,125.095 121.285,123.063 121.285,62.962 U1.1
VBAT-: BT1.N U1.2 | length 53.6
  Top Layer w1: U1.2 118.872,69.469 118.872,104.394 115.87,107.396 BT1.N
VOUT: C12.1 C17.1 R7.1 R9.1 U1.3 U3.1 U4.1 | length 31.6
  Top Layer w0.5: U4.1 102.861,66.487 103.683,65.664 106.97,65.664 ; U3.1 105.257,73.853 105.579,74.175 105.579,74.36 105.579,71.656 C12.1 105.881,71.298 105.881,70.268 107.02,69.129 R9.1 106.97,67.448 106.97,65.664 ; C17.1 106.793,63.726 115.685,54.834 U1.3 ; C17.1@106.97,63.881 106.97,65.664
pads on no net: BT1. JP2.1 JP2.3 JP2.4 JP2.5 JP2.6 JP2.7 JP2.8 JP2.9 JP2.10 JP2.11 JP2.13 JP2.14 JP2.19 JP2.20 JP2.23 JP2.24 U2.1 U2.10 U2.11 U2.21 U2.22 U2.25 U2.26 U2.27 U2.28 U2.29 U2.32 U2.33 U2.38 U2.39 U2.40 U2.41 U2.42 U2.43 U2.45 U3.4 U4.4 U5.4 U5.5 U5.8 U5.9 U5.10 U5.11 U5.12 U5.13 U5.14 U5.16 U5.17 U5.18 U5.19 U5.20 U5.21 U5.22 U5.23 U5.24 U5.26 U5.29 U5.30 U5.31 U5.32 U5.33 U5.36 U5.37 U5.39_1 U5.39_2 U5.39_3 U5.39_4 U5.39_5 U5.39_6 U5.39_7 U5.39_8 U5.39_9 U5.40_1 U5.40_2 U5.40_3 U5.40_4 U5.40_5 U5.40_6 U5.40_7 U5.40_8 U5.40_9 U5.40_10 U5.40_11 U5.40_12

## Polygon pours and split planes (outlines as drawn)
GND on Top Layer "GND_L01_P000" (solid, remove dead copper, pour order 0): 30,130 30,47.371 122.936,47.371 122.936,130
GND on Bottom Layer "GND_L02_P002" (solid, remove dead copper, pour order 2): 30,130 30,47.371 122.936,47.371 122.936,130
GND on Bottom Layer "GND_L02_P001" (solid, remove dead copper, pour order 1): 30,130 30,47.371 122.936,47.371 122.936,130

## Keep-outs
Keep-Out Layer:
  the board outline again, w0.5

## Silkscreen, mask and mechanical layers (free items; w line width, h text height)
Top Overlay:
  text "-" at 120.031,106.346 h3
  text "+" at 30.623,106.33 h3
  text "GND" at 118.722,102.299 h1 r90
  text "LED_PW" at 72.479,102.298 h1
  text "RX0" at 37.996,101.028 h1 r270
  text "1" at 95.227,100.798 h1 r90
  text "1" at 88.568,100.671 h1 r90
  text "PB9" at 73.978,98.829 h1
  text "SWCLK" at 120.881,98.759 h1 r90
  text "PC13" at 67.72,98.702 h1
  text "TX0" at 37.996,97.091 h1 r270
  text "SWIO" at 118.976,95.406 h1 r90
  text "BOOT1" at 95.227,95.37 h1 r90
  text "BOOT0" at 88.623,95.203 h1 r90
  text "3V3" at 121.008,93.409 h1 r90
  text "GND" at 37.996,93.408 h1 r270
  text "0" at 88.623,93.266 h1 r90
  text "0" at 95.227,93.266 h1 r90
  text "RST_STM" at 42.769,92.773 h1
  text "UART0_ESP" at 31.319,91.426 h1 r90
  text "GND" at 119.357,88.329 h1 r90
  text "RX" at 119.357,85.4 h1 r90
  text "TX" at 119.357,82.352 h1 r90
  text "SWSTM" at 118.976,72.978 h1 r90
  text "BOOT_ESP" at 57.509,67.119 h1
  text "EN_ESP" at 30.95,54.546 h1
  text "RST" at 90.742,51.585 h1
  text "LED_35" at 42.761,51.371 h1
  text "SW_ESP" at 53.683,51.371 h1
  text "LED_34" at 42.761,49.847 h1
  text "LED_PW" at 42.761,48.196 h1

## Text inside footprints (layer, text, board x,y; h text height)
IC1: Top Overlay "RefDes" at 85.979,70.866 h1.27; Top Overlay "REFDES" at 85.661,70.866 h1.27; Mechanical 13 "RefDes2" at 85.661,70.866 h1.27
U5: Mechanical 2 "1" at 33.907,72.059 h1.52 r90